# Altium PCB V3.0_2021-01-11_10-16-39.pcbdoc
Units mil, origin at the board's own origin, x right, y up, seen from the top; angles counter-clockwise.
Board outline 3698.78 x 3572.32 mil, 2 copper layers (Top Layer, Bottom Layer); 15 components, 62 nets, 101 pads, 6 vias.
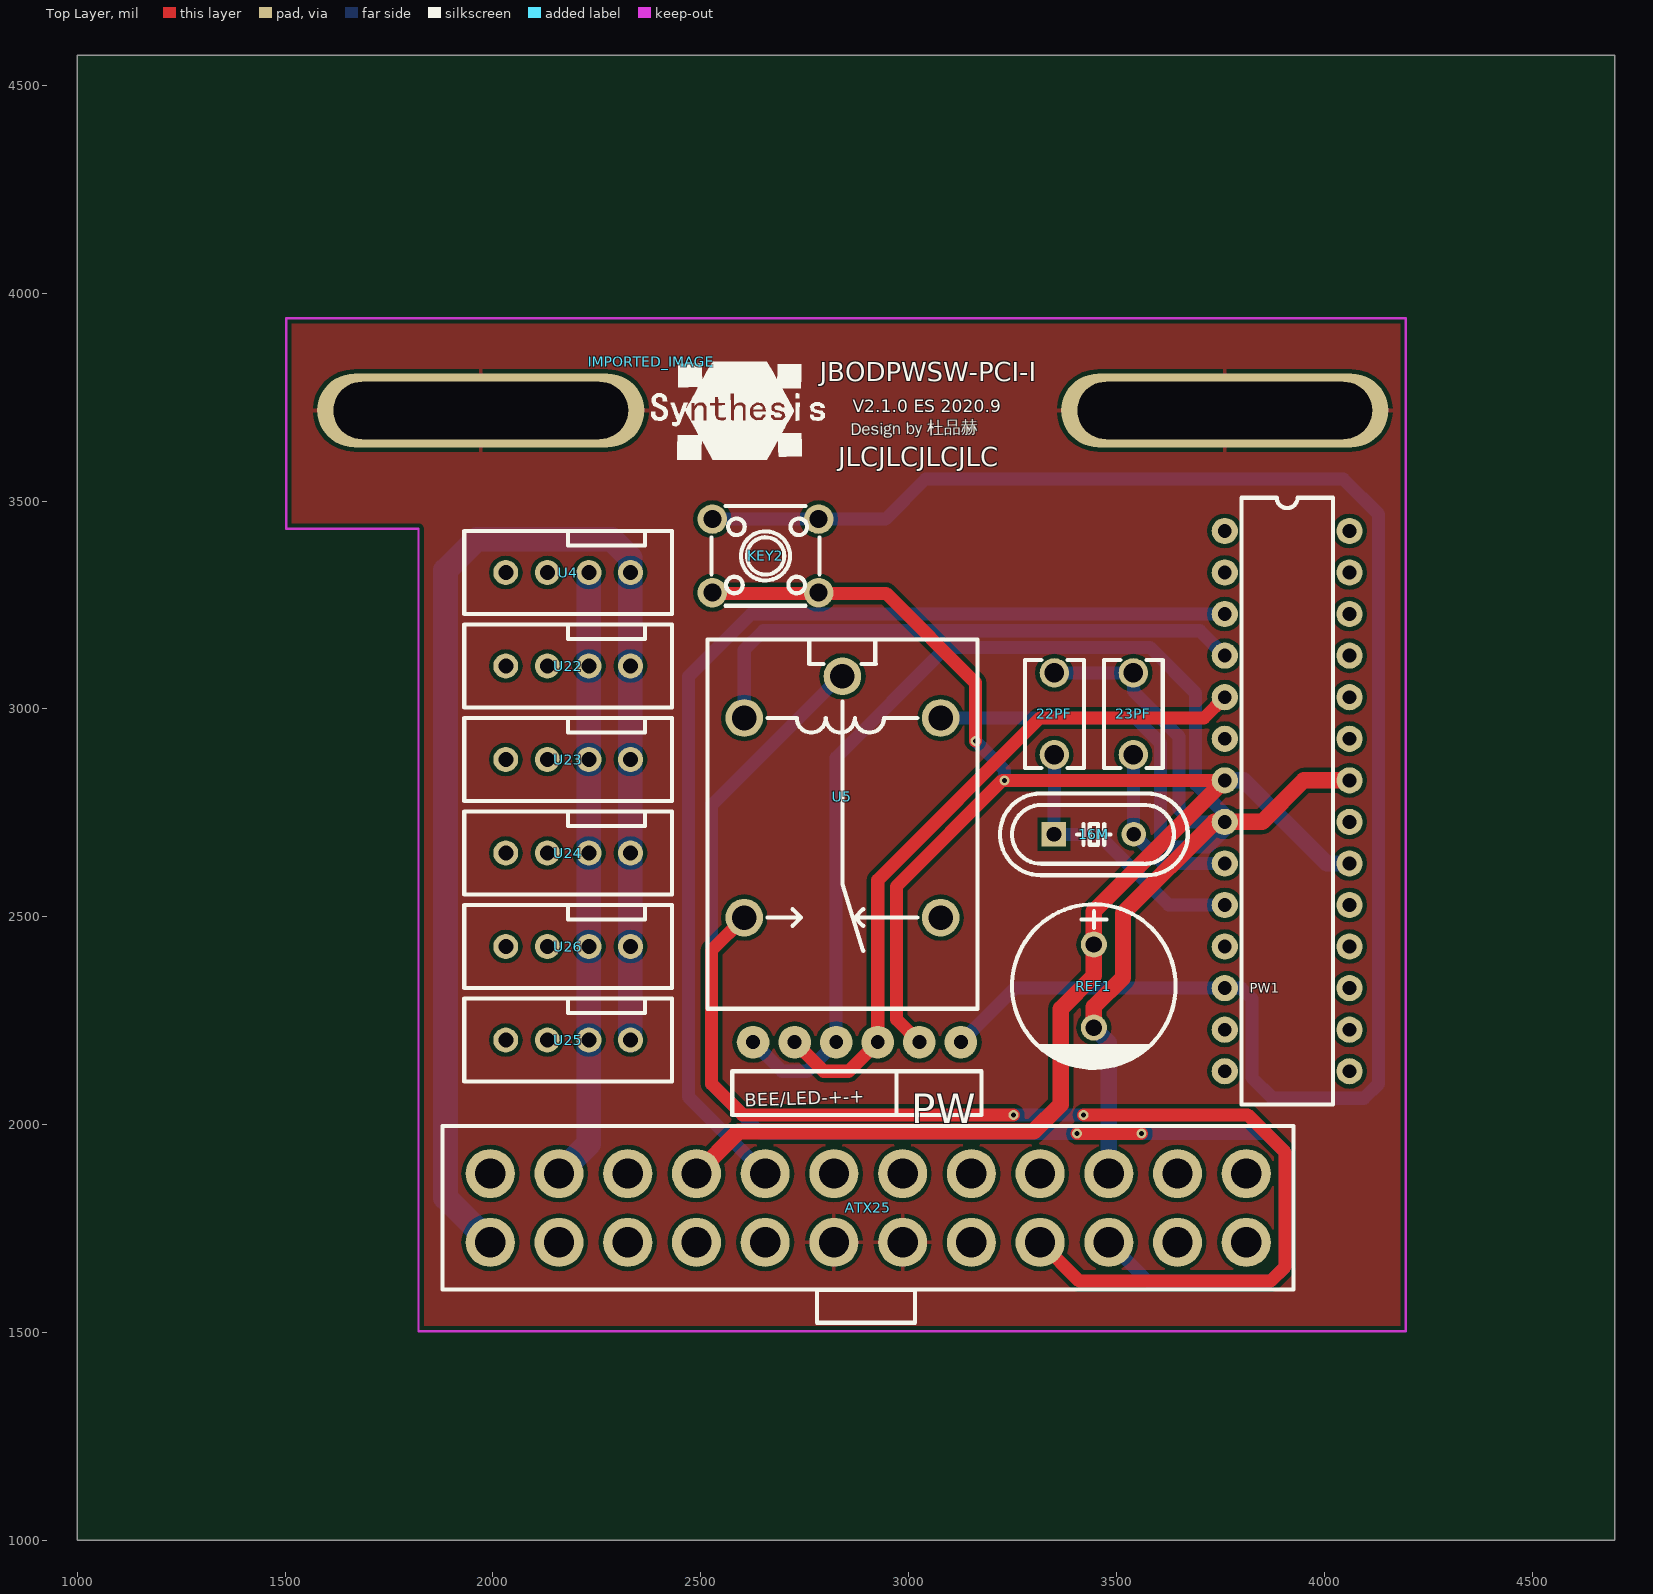
[diagram p0: Top Layer view]
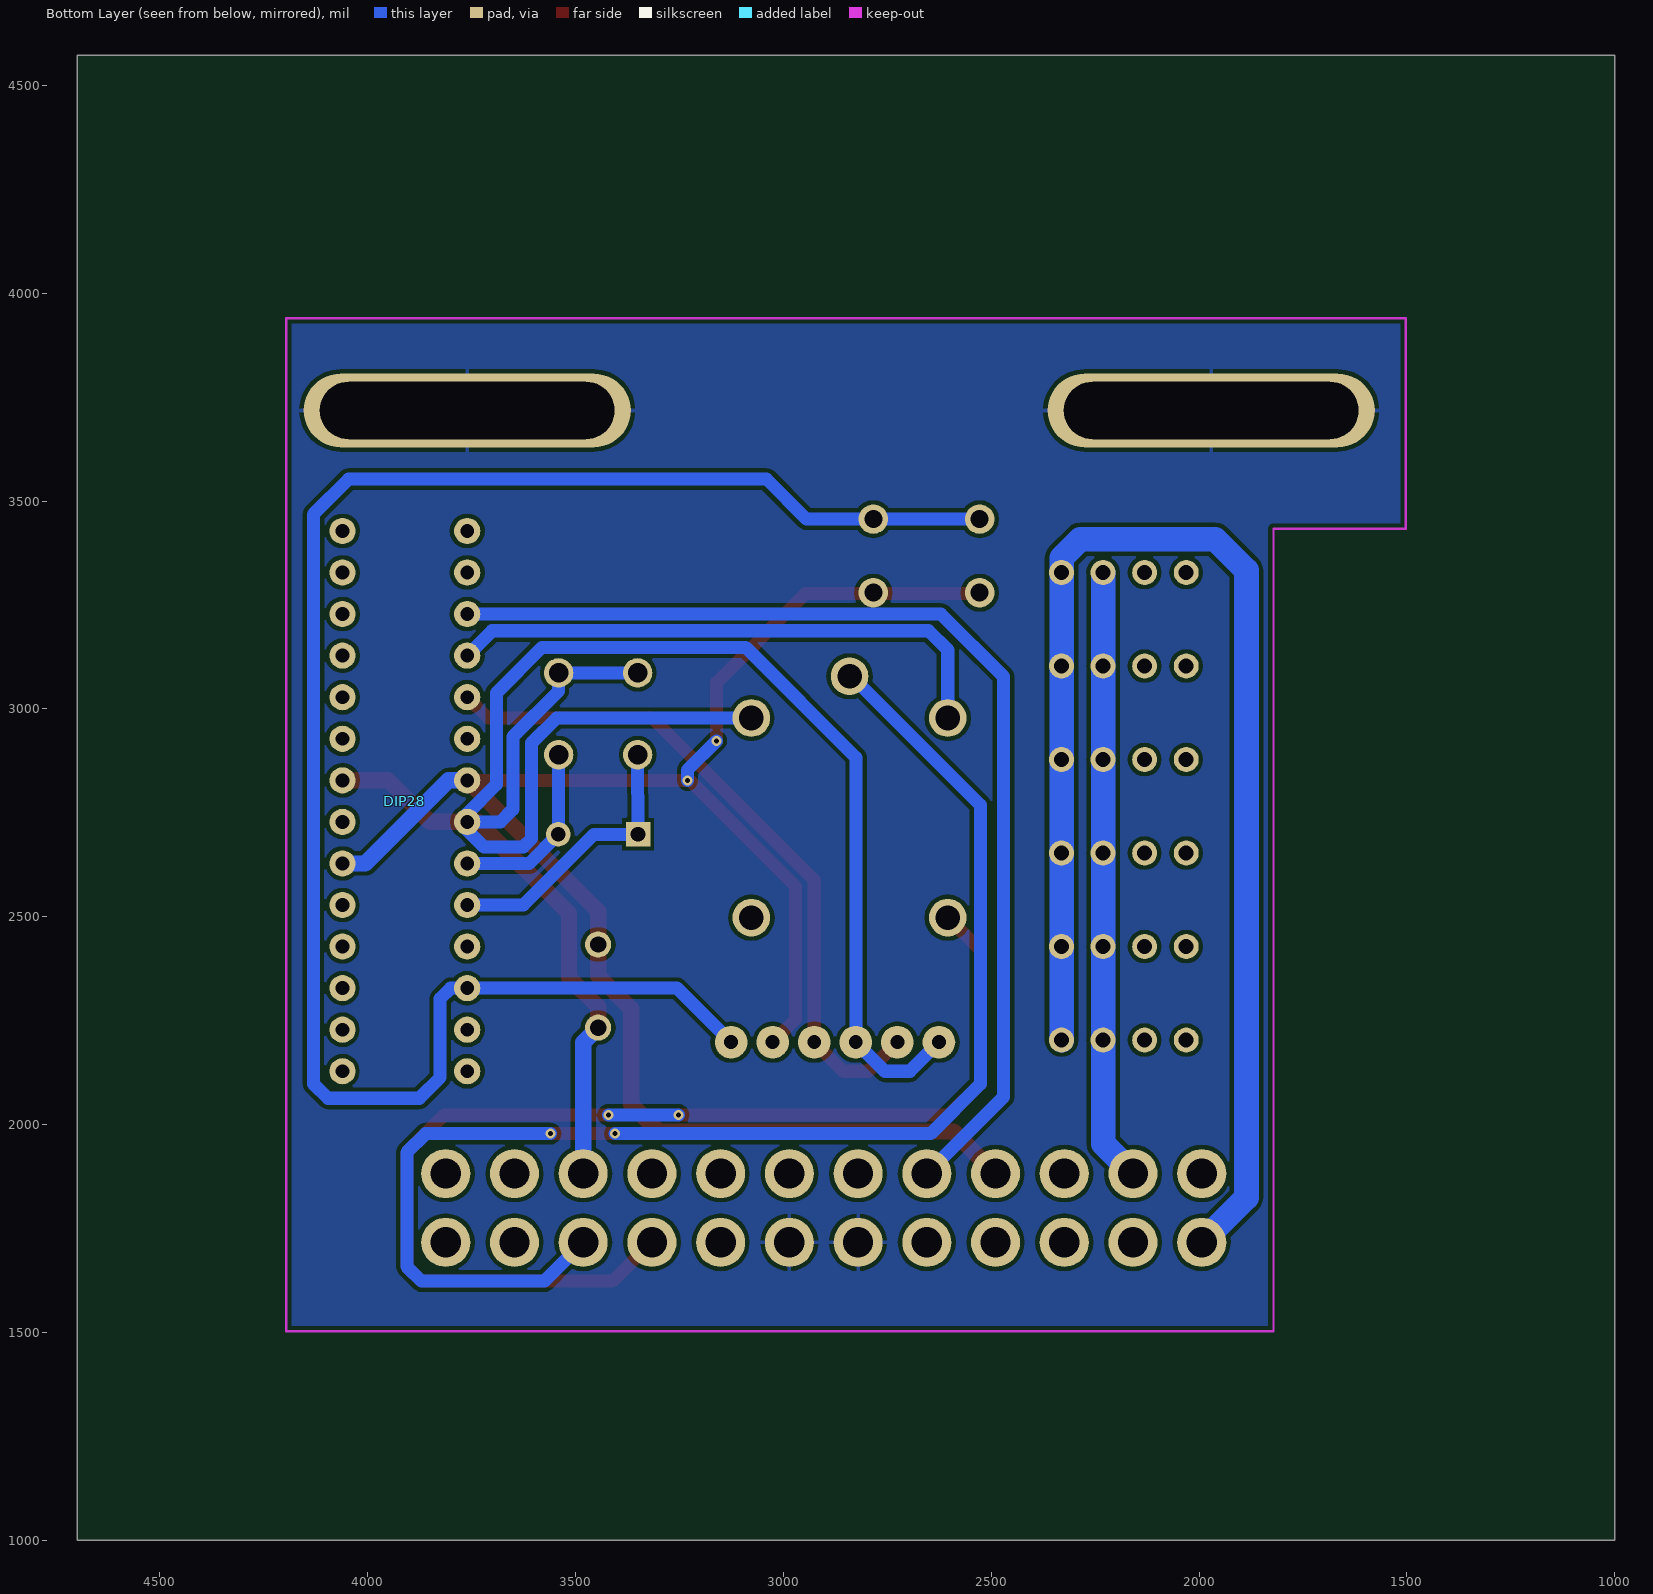
[diagram p1: Bottom Layer view, seen from below]

## Layer stack, top to bottom
Top Solder: solder mask 0.4, Solder Resist, Dk 3.5
Top Layer: signal copper 1.4
Dielectric1: dielectric 12.6, FR-4, Dk 4.8
Bottom Layer: signal copper 1.4
Bottom Solder: solder mask 0.4, Solder Resist, Dk 3.5

## Board outline
4698.78,1000 1000,1000 1000,4572.32 4698.78,4572.32

## Design rules (kind name [scope] priority, off if disabled: settings)
Clearance [All] p1: gap=10 ignorepadtopadclearanceinfootprint=FALSE except(0: Arc-Hole Track-Hole SMDPad-Hole THPad-Hole Via-Hole Fill-Hole Poly-Hole Region-Hole Text-Hole)
PolygonConnect [All] p1: connectstyle=Relief reliefconductorwidth=10 reliefentries=4 polygonreliefangle="90 Angle" airgapwidth=10
RoutingVias [All] p1: holewidth=28 width=50 viastyle="Through Hole" minholewidth=28 minwidth=50 maxholewidth=28 maxwidth=50
SolderMaskExpansion [All] p1: expansion=4 istentingtop=FALSE
Width [All] p1: maxlimit=10 minlimit=10 preferedwidth=10
30 further rules are at their usual default settings.

## Components (designator, comment, footprint, x,y, rotation, side; value= is the part's Value field where it differs from the comment)
16M "HC-49US_L11.5-W4.5-P4.88" HC-49US_L11.5-W4.5-P4.88 3445.79,2697.99 r0 top
22PF "CAP-TH_L6.5-W3.5-P5.00-D1.2" CAP-TH_L6.5-W3.5-P5.00-D1.2 3350.79,2987.99 r270 top
23PF "CAP-TH_L6.5-W3.5-P5.00-D1.2" CAP-TH_L6.5-W3.5-P5.00-D1.2 3540.79,2987.99 r270 top
ATX25 "ATX-24PIN_1" ATX-24PIN_1 3925.79,1602.99 r180 top
DIP28 "_" ATMEGA328P-PU 3910.79,2777.99 r270 bottom
IMPORTED_IMAGE "Comment" IMPORTED_IMAGE 2380.47,3835.66 r0 top
KEY2 "KEY-TH_4P-L6.0-W6.0-P4.50-LS6.5" KEY-TH_4P-L6.0-W6.0-P4.50-LS6.5 2655.79,3367.99 r180 top
REF1 "CAP-TH_BD10.0-P5.00-D1.0-FD" CAP-TH_BD10.0-P5.00-D1.0-FD 3445.79,2332.99 r270 top
U4 "FAN" FAN 1930.79,3227.99 r0 top
U5 "RELAY-TH_G5LE-14-XX" RELAY-TH_G5LE-14-XX 2840.79,2787.99 r270 top
U22 "FAN" FAN 1930.79,3002.99 r0 top
U23 "FAN" FAN 1930.79,2777.99 r0 top
U24 "FAN" FAN 1930.79,2552.99 r0 top
U25 "FAN" FAN 1930.79,2102.99 r0 top
U26 "FAN" FAN 1930.79,2327.99 r0 top

## Footprints (in the part's own frame and the unit in brackets; to place one, negate y for a bottom-side part, rotate by r counter-clockwise, add the part's x,y. Pads: shape width x height; smd on the part's side, far side on the other; paste and mask are expansions set on the pad)
ATMEGA328P-PU [mm]
  round 1.6 hole 0.848: 1(-16.51,3.81) 2(-13.97,3.81) 3(-11.43,3.81) 4(-8.89,3.81) 5(-6.35,3.81) 6(-3.81,3.81) 7(-1.27,3.81) 8(1.27,3.81) 9(3.81,3.81) 10(6.35,3.81) 11(8.89,3.81) 12(11.43,3.81) 13(13.97,3.81) 14(16.51,3.81) 15(16.51,-3.81) 16(13.97,-3.81) 17(11.43,-3.81) 18(8.89,-3.81) 19(6.35,-3.81) 20(3.81,-3.81) 21(1.27,-3.81) 22(-1.27,-3.81) 23(-3.81,-3.81) 24(-6.35,-3.81) 25(-8.89,-3.81) 26(-11.43,-3.81) 27(-13.97,-3.81) 28(-16.51,-3.81)
ATX-24PIN_1 [mm]
  round 3 hole 1.85: 1(2.88,-7.08) 2(7.08,-7.08) 3(11.28,-7.08) 4(15.48,-7.08) 5(19.68,-7.08) 6(23.88,-7.08) 7(28.08,-7.08) 8(32.28,-7.08) 9(36.48,-7.08) 10(40.68,-7.08) 11(44.88,-7.08) 12(49.08,-7.08) 13(2.88,-2.88) 14(7.08,-2.88) 15(11.28,-2.88) 16(15.48,-2.88) 17(19.68,-2.88) 18(23.88,-2.88) 19(28.08,-2.88) 20(32.28,-2.88) 21(36.48,-2.88) 22(40.68,-2.88) 23(44.88,-2.88) 24(49.08,-2.88)
  silkscreen extent 0,-10 52,2.03
CAP-TH_BD10.0-P5.00-D1.0-FD [mm]
  round 1.6 hole 1: 1(-2.54,0) 2(2.54,0)
  silkscreen extent -5,-4.99 5.08,5
CAP-TH_L6.5-W3.5-P5.00-D1.2 [mm]
  round 1.8 hole 1.2: 1(-2.5,0) 2(2.5,0)
  silkscreen extent -3.3,-1.8 3.3,1.8
FAN [mil]
  round 60 hole 36: 1(100,100) 2(200,100) 3(300,100) 4(400,100)
  silkscreen extent 0,0 500,200
HC-49US_L11.5-W4.5-P4.88 [mm]
  rect 1.5x1.5 hole 0.9: 1(-2.438,0)
  round 1.5 hole 0.9: 2(2.438,0)
  silkscreen extent -5.74,-2.5 5.74,2.5
IMPORTED_IMAGE [mil]
  silkscreen extent 0,-236 417,0
KEY-TH_4P-L6.0-W6.0-P4.50-LS6.5 [mm]
  round 1.8 hole 1.1: 1(-3.251,-2.25) 2(3.251,-2.25) 3(3.251,2.25) 4(-3.251,2.25)
  silkscreen extent -3.3,-3.05 3.3,3.05
RELAY-TH_G5LE-14-XX [mm]
  round 2.3 hole 1.5: 1(-7.375,0) 2(-4.825,-6) 3(7.375,-6) 4(7.375,6) 5(-4.825,6)
  silkscreen extent -9.63,-8.25 12.96,8.25

## Free pads (board coordinates)
  round 78.74 hole 33.4: 15(2725.79,2197.99) 15(2825.79,2197.99) 15(2925.79,2197.99) 15(3025.79,2197.99) 15(3125.79,2197.99) 16(2625.79,2197.99)
  oval 787.4x177.16 hole 137.8 slot 708.66 at 0 deg: 17(1970.79,3717.99) 17(3760.79,3717.99)

## Via types
v1: diameter 24, hole 12, Top Layer to Bottom Layer, 6 vias

## Nets (pads, with @x,y where several pads share a name; then routed paths per layer and width w, separated by ;. In a path a pad name is that pad's centre, name@x,y a point inside that pad or via, vN(x,y) a via of type N, cw(c..) or ccw(c..) an arc to the next point about the centre after c; other vN are vias at no path point)
2: U5.2 | length 1364
  Bottom Layer w31.5: U5.2 2604.59,3141.79 2650.79,3187.99 3700.79,3187.99 3760.79,3127.99
5: U5.5 | length 983.5
  Bottom Layer w31.5: U5.5 3545.79,2977.99 3605.79,2917.99 3605.79,2687.99 3625.79,2667.99 3720.79,2667.99 3760.79,2707.99 3760.79,2727.99
5V0: ATX25.9 REF1.1 | length 1888.7
  Top Layer w39.37: ATX25.9 2590.89,1982.99 3300.79,1982.99 3365.79,2047.99 3365.79,2277.99 3445.79,2357.99 REF1.1 3445.79,2512.99 3760.79,2827.99
12V1: ATX25.11
12V2: ATX25.10
+5V: DIP28.7 DIP28.20 KEY2.3 KEY2.4 pad.15@3025.79,2197.99 | length 2664.9
  Top Layer w31.5: KEY2.3 2529.19,3277.99 KEY2.4@2785.19,3277.99 ; KEY2.4 KEY2.4@2785.19,3277.99 ; pad.15@3025.79,2197.99 2970.79,2252.99 2970.79,2572.99 3225.79,2827.99 v1(3230.79,2827.99) DIP28.7 ; v1(3160.79,2922.99) 3160.79,3062.99 2945.79,3277.99 KEY2.4@2785.19,3277.99
  Bottom Layer w31.5: v1(3160.79,2922.99) 3230.79,2852.99 v1(3230.79,2827.99)
  Bottom Layer w39.37: DIP28.7 3805.79,2827.99 4005.79,2627.99 DIP28.20
-5V: pad.15@2825.79,2197.99 pad.16 | length 2302.3
  Bottom Layer w31.5: pad.16 2695.79,2127.99 2755.79,2127.99 2825.79,2197.99 2825.79,2882.99 3090.79,3147.99 3580.79,3147.99 3690.79,3037.99 3690.79,2817.99 3760.79,2747.99 3760.79,2727.99
A0: DIP28.23
AD1: DIP28.24
AD2: DIP28.25
AD3: DIP28.26
AD4SDA: DIP28.27
AD5SCL: DIP28.28
AGND: DIP28.8 DIP28.22 | length 981.5
  Top Layer w39.37: 3445.79,2232.99 3445.79,2282.99 3515.79,2352.99 3515.79,2507.99 3735.79,2727.99 DIP28.8 3850.79,2727.99 3950.79,2827.99 DIP28.22
AREF: DIP28.21
BEE-: ATX25.17
F5V: U4.3 U22.3 U23.3 U24.3 U25.3 U26.3 | length 1476.1
  Bottom Layer w59.05: 2158.86,1881.73 2230.79,1953.66 U25.3 U26.3 U24.3 U23.3 U22.3 U4.3
FGND: ATX25.24 U4.4 U22.4 U23.4 U24.4 U25.4 U26.4 | length 3315.9
  Bottom Layer w59.05: ATX25.24 1885.79,1824.09 1885.79,3332.99 1960.79,3407.99 2285.79,3407.99 2330.79,3362.99 U4.4 U22.4 U23.4 U24.4 U26.4 U25.4
GND: ATX25.18 ATX25.19 pad.17
IO0: DIP28.2
IO1: ATX25.8 DIP28.3 | length 2624.7
  Bottom Layer w31.5: ATX25.8 2470.79,2065.79 2470.79,3077.99 2620.79,3227.99 DIP28.3
IO2: DIP28.4
IO3: DIP28.5
IO4: DIP28.6
IO5: DIP28.11
IO7: DIP28.13
IO9: DIP28.15
LED: pad.15@2725.79,2197.99 pad.15@2925.79,2197.99 | length 1665.2
  Top Layer w31.5: pad.15@2725.79,2197.99 2795.79,2127.99 2855.79,2127.99 2925.79,2197.99 2925.79,2587.99 3315.79,2977.99 3710.79,2977.99 3760.79,3027.99
MISO: DIP28.18
MOSI: DIP28.17
N00: ATX25.1
N01: ATX25.13
N02: ATX25.2
N03: ATX25.14
N04: ATX25.4
N05: ATX25.5
N06: ATX25.6
N07: ATX25.20
N08: ATX25.21
N09: ATX25.22
N11: ATX25.23
N12: ATX25.12
N13: U5.4
N15: ATX25.7
PW: DIP28.12 KEY2.1 KEY2.2 pad.15@3125.79,2197.99 | length 4342.5
  Bottom Layer w31.5: KEY2.2 KEY2.1 2944.39,3456.59 3040.79,3552.99 4045.79,3552.99 4130.79,3467.99 4130.79,2097.99 4095.79,2062.99 3875.79,2062.99 3825.79,2112.99 3825.79,2302.99 3800.79,2327.99 DIP28.12 3255.79,2327.99 pad.15@3125.79,2197.99
PW1: ATX25.16 U5.3 | length 2798.3
  Top Layer w31.5: U5.3 2525.79,2418.89 2525.79,2097.99 2600.79,2022.99 v1(3252.69,2022.99) ; ATX25.16@3316.39,1716.39 3317.39,1716.39 3410.79,1622.99 3870.79,1622.99 3905.79,1657.99 3905.79,1932.99 3815.79,2022.99 v1(3421.21,2022.99)
  Bottom Layer w31.5: v1(3252.69,2022.99) v1(3421.21,2022.99)
PW2: ATX25.15 U5.1 | length 3314.2
  Top Layer w31.5: v1(3405.06,1977.99) v1(3560.79,1977.99)
  Bottom Layer w31.5: U5.1 2836.09,3078.29 2525.79,2767.99 2525.79,2097.99 2645.79,1977.99 v1(3405.06,1977.99) ; ATX25.15 3575.09,1622.99 3870.79,1622.99 3905.79,1657.99 3905.79,1932.99 3860.79,1977.99 v1(3560.79,1977.99)
RE: DIP28.14
RESET: DIP28.1
S$21: 
S$23: 
S$38: 
S$42: 
S$46: 
S$3934: ATX25.3 REF1.2 | length 366.2
  Bottom Layer w39.37: REF1.2 3481.69,2197.09 ATX25.3
S$4221: 22PF.1 23PF.1 | length 686.4
  Bottom Layer w31.5: 22PF.1 23PF.1 3540.79,3042.99 3650.79,2932.99 3650.79,2757.99 3680.79,2727.99 3760.79,2727.99
S$4223: 16M.1 22PF.2 | length 191.6
  Bottom Layer w31.5: 16M.1 22PF.2
S$7646: 
SCK: DIP28.19
SS: DIP28.16
XTAL1: 16M.2 23PF.2 DIP28.9 | length 440
  Bottom Layer w31.5: 23PF.2 3540.79,2698.99 16M.2 3611.8,2627.98 DIP28.9
XTAL2: DIP28.10 | length 481.4
  Bottom Layer w31.5: 3349.79,2697.99 3455.79,2697.99 3625.79,2527.99 DIP28.10
pads on no net: U4.1 U4.2 U22.1 U22.2 U23.1 U23.2 U24.1 U24.2 U25.1 U25.2 U26.1 U26.2

## Polygon pours and split planes (outlines as drawn)
GND on Top Layer "Top Layer-GND" (solid, pour order 0): 2730.79,1802.99 2730.79,1627.99 2735.79,1622.99 2905.79,1622.99 2910.79,1627.99 2910.79,1782.99 2895.79,1797.99
GND on Top Layer "Top Layer-GND 1" (solid, pour order 2): 1510.79,3932.99 4190.79,3932.99 4190.79,1507.99 1825.79,1507.99 1825.79,3437.99 1510.79,3437.99
GND on Bottom Layer "Bottom Layer-GND" (solid, pour order 1): 2735.79,1797.99 2905.79,1797.99 2905.79,1627.99 2745.79,1627.99 2740.79,1632.99
GND on Bottom Layer "Bottom Layer-GND 1" (solid, pour order 3): 1510.79,3932.99 4190.79,3932.99 4190.79,1507.99 1825.79,1507.99 1825.79,3437.99 1510.79,3437.99

## Silkscreen, mask and mechanical layers (free items; w line width, h text height)
Top Overlay:
  lines w9.84: 2970.79,2022.99 2970.79,2127.99
  lines w10: 2575.79,2022.99 3175.79,2022.99 3175.79,2127.99 2575.79,2127.99 2575.79,2022.99
  text "JBODPWSW-PCI-I" at 2785.79,3772.99 h78.74
  text "V2.1.0 ES 2020.9" at 2865.79,3702.99 h51.18
  text "Design by 杜品赫" at 2860.79,3647.99 h51.18 r1
  text "JLCJLCJLCJLC" at 2830.79,3567.99 h78.74
  text "PW1" at 3820.79,2307.99 h39.37
  text "BEE/LED-+-+" at 2606.34,2042.25 h31.5 r2
  text "PW" at 3005.79,2002.56 h70.87
Document:
  lines w0.1: 2848.39,2785.16 2850.39,2787.16